# EAGLE board resistor (EAGLE 9.6.2)
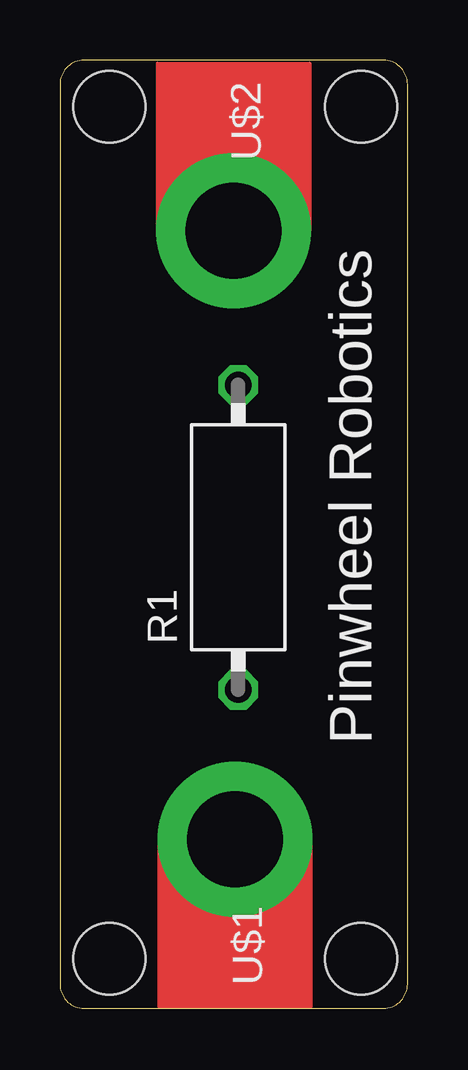
[diagram p0: board, top side]
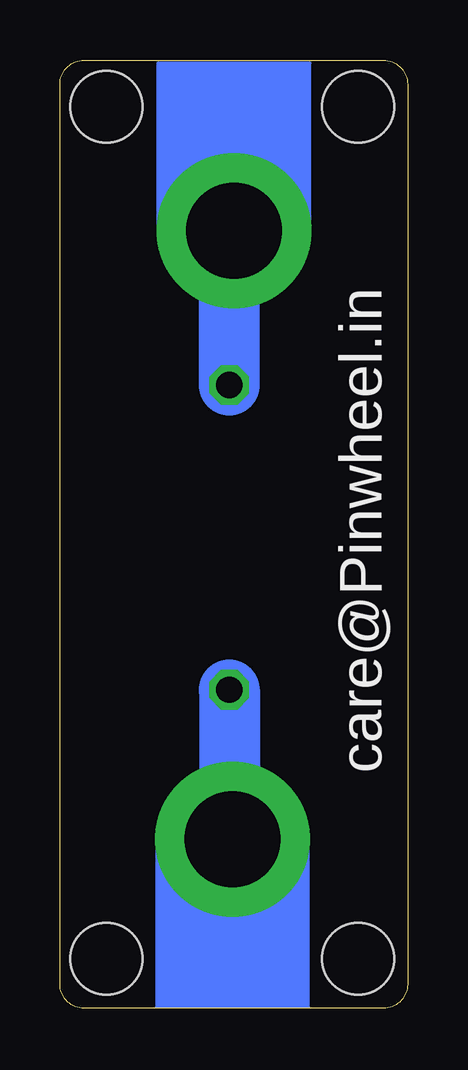
[diagram p1: board, bottom side, seen from below]

Size 14.5 x 39.5 mm. Coordinates in mm from the lower left corner, seen from the top.
Outline: 0,38.5 0,1 arc90 1,0 13.5,0 arc90 14.5,1 14.5,38.5 arc90 13.5,39.5 1,39.5 arc90 0,38.5
Copper layers (1*16): Top 0.035mm / dielectric 1.5mm / Bottom 0.035mm
Design rules "default": minimum track width 6mil, minimum drill 0.35mm, track to track 6mil, track to pad 6mil, pad to pad 6mil, via to via 6mil, smd to smd 6mil, copper to edge 40mil, drill to drill 6mil, minimum pad ring 10mil, minimum via ring 8mil, stop-mask expansion 4mil, vias tented up to drill 0mil, thermal gap 10mil
Holes 3 mm at 2.06,37.56 12.56,37.56 2.06,2.06 12.56,2.06

## Footprints (pad centres in the part's own frame; a part is rotated, then mirrored left to right if it is on the bottom)
VMTB60 = drill 1.1 octagon: 1 -6.35,0; 2 6.35,0
MICROBIT_PAD = drill 4 pad 6.452: PAD 0,0

## Placement (x,y rotation side)
R1  [VMTB60]  7.43,19.62 90 top
U$1  MICROBIT_PAD  [MICROBIT_PAD]  7.3,7.05 0 top
U$2  MICROBIT_PAD  [MICROBIT_PAD]  7.25,32.4 180 top

## Library data of the parts
R1 = rcl; SPICEPREFIX: R
U$1 U$2 = microbit

## Nets
N$1: R1.1 U$1.PAD
N$2: R1.2 U$2.PAD

## Tracks (layer width: path | path; a pad name or v marks a point on that pad's centre or on a via)
N$1
  Bottom 0.508: 7.43,7.36 arc-45 U$1.PAD
  Bottom 2.54: R1.1 7.43,7.36
N$2
  Bottom 0.508: 7.43,31.72 arc45 U$2.PAD
  Bottom 2.54: R1.2 7.43,31.72

## Text on the board
tPlace: Pinwheel Robotics
bPlace: care@Pinwheel.in